# EAGLE board V1.3_Placa de sensores multiplexada (EAGLE 5.11)
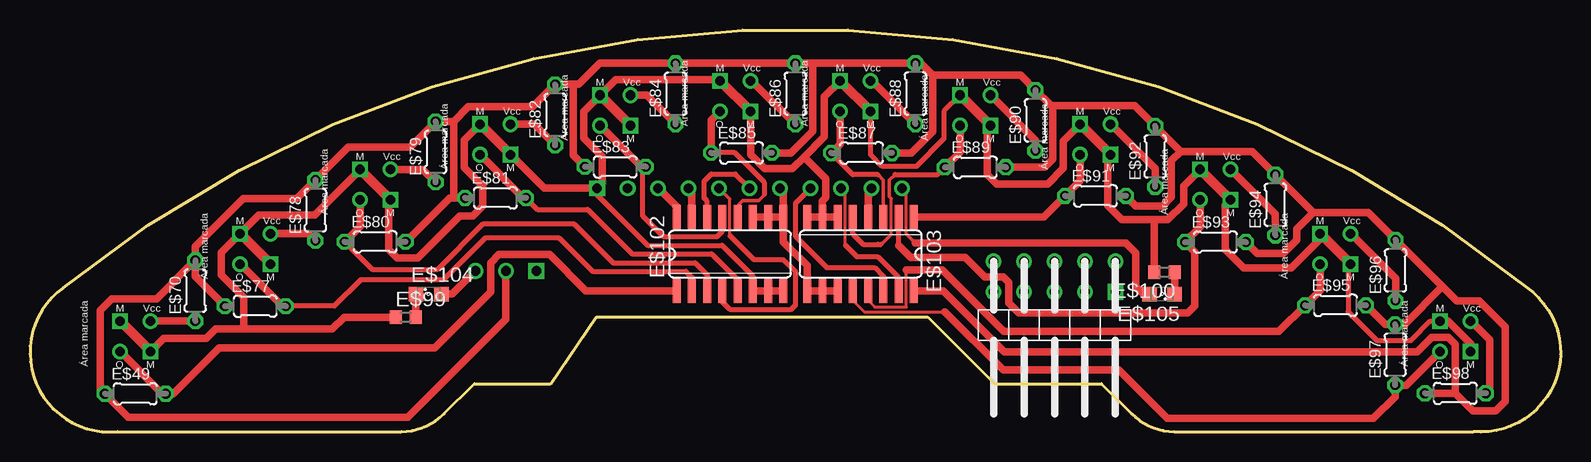
[diagram p0: board, top side]
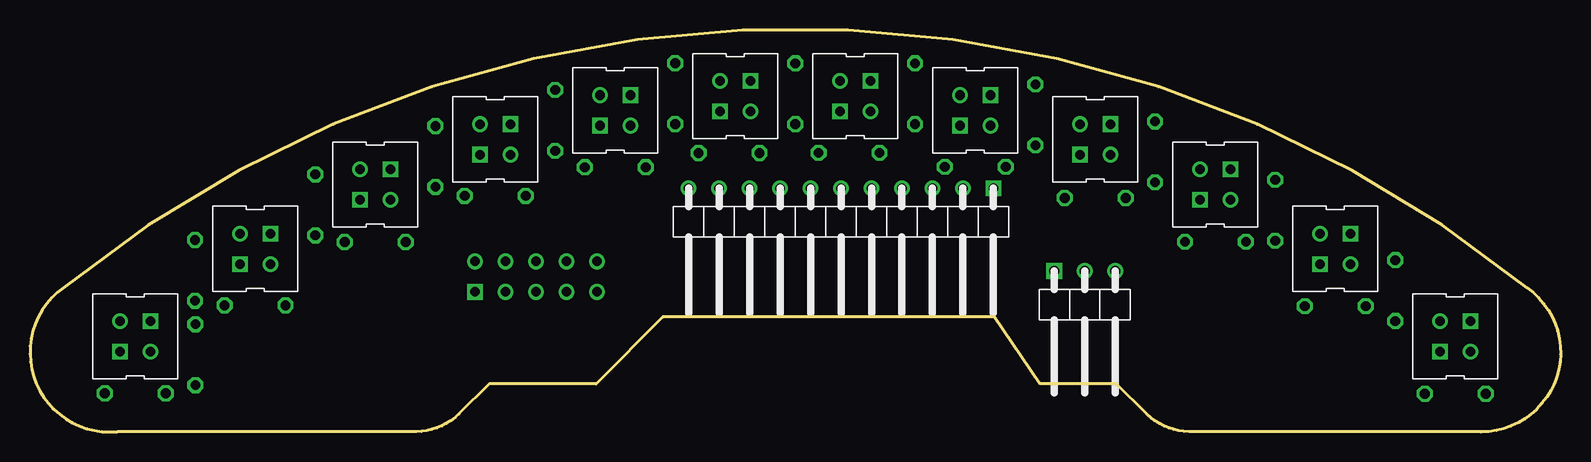
[diagram p1: board, bottom side, seen from below]

Size 127.55 x 33.53 mm. Coordinates in mm from the lower left corner, seen from the top.
Outline: 2.78,12.03 arc-78 124.78,12.03 arc-150 120.28,0.03 95.35,0.03 arc-45 91.81,1.5 89.28,4.03 80.38,4.01 74.81,9.58 47.2,9.58 43.4,4.03 37.03,4.03 34.49,1.5 arc-45 30.95,0.03 7.28,0.03 arc-150 2.78,12.03
Copper layers (1*16): Top 0.035mm / dielectric 1.5mm / Bottom 0.035mm
Design rules "default": minimum track width 10mil, minimum drill 24mil, track to track 8mil, track to pad 8mil, pad to pad 8mil, via to via 8mil, smd to smd 8mil, copper to edge 40mil, drill to drill 8mil, minimum pad ring 10mil, minimum via ring 8mil, stop-mask expansion 4mil, vias tented up to drill 0mil, thermal gap 10mil

## Footprints (pad centres in the part's own frame; a part is rotated, then mirrored left to right if it is on the bottom)
CNY70 = drill 0.8 square: P$1 -1.27,1.27; P$2 1.27,-1.27 | drill 0.8 round: P$3 1.27,1.27; P$4 -1.27,-1.27
TIRADE3PINESTUMBADOS = drill 0.8 round: P$1 1.27,-1.524; P$2 3.81,-1.524 | drill 0.8 square: P$3 6.35,-1.524
CON_M_RT_ANG_2X5 = drill 0.8 round: P$1 -4.064,11.43; P$3 -1.524,8.89; P$4 -4.064,8.89; P$5 -4.064,6.35; P$6 -4.064,3.81; P$7 -4.064,1.27; P$8 -1.524,1.27; P$9 -1.524,3.81; P$10 -1.524,6.35 | drill 0.8 square: P$2 -1.524,11.43
0204/5 = drill 0.813 octagon: 1 -2.54,0; 2 2.54,0
R0603 = smd 1 x 1.1: 1 -0.85,0; 2 0.85,0
11_PINES_MACHO_TUMBADOS = drill 0.8 round: P$1 3.81,-1.524; P$2 6.35,-1.524; P$3 8.89,-1.524; P$4 11.43,-1.524; P$5 13.97,-1.524; P$6 16.51,-1.524; P$7 19.05,-1.524; P$8 21.59,-1.524; P$9 24.13,-1.524; P$10 26.67,-1.524 | drill 0.8 square: P$11 1.27,-1.524
SO16 = smd 0.66 x 2.032: 1 -4.445,-3.073; 2 -3.175,-3.073; 3 -1.905,-3.073; 4 -0.635,-3.073; 5 0.635,-3.073; 6 1.905,-3.073; 7 3.175,-3.073; 8 4.445,-3.073; 9 4.445,3.073; 10 3.175,3.073; 11 1.905,3.073; 12 0.635,3.073; 13 -0.635,3.073; 14 -1.905,3.073; 15 -3.175,3.073; 16 -4.445,3.073
SML0805 = smd 1.2 x 1.2: A 1.05,0; C -1.05,0

## Placement (x,y rotation side)
E$1  [DIBUJO_ARAÑAZOS]  23.04,2.58 90 top
E$2  [DIBUJO_ARAÑAZOS]  85.68,18.68 0 top
E$10  [CNY70]  28.78,20.63 0 top
E$20  [CNY70]  88.78,24.4 0 top
E$22  [CNY70]  98.78,20.63 0 top
E$23  [CNY70]  108.78,15.27 0 top
E$28  [CNY70]  78.78,26.82 0 top
E$40  [CNY70]  68.78,28.01 0 top
E$41  [CNY70]  58.78,28.01 0 top
E$42  [CNY70]  118.78,7.97 0 top
E$43  [CNY70]  48.78,26.82 0 top
E$44  [TIRADE3PINESTUMBADOS]  35.85,11.9 180 bottom
E$45  [CON_M_RT_ANG_2X5]  79.03,10.16 270 top
E$46  [CNY70]  38.78,24.4 0 top
E$47  [CNY70]  18.78,15.27 0 top
E$48  [CNY70]  8.78,7.97 0 top
E$49  [0204/5]  8.78,3.18 0 top
E$70  [0204/5]  13.78,11.79 90 top
E$77  [0204/5]  18.78,10.49 0 top
E$78  [0204/5]  23.79,18.49 90 top
E$79  [0204/5]  33.81,23.36 90 top
E$80  [0204/5]  28.77,15.86 0 top
E$81  [0204/5]  38.79,19.52 0 top
E$82  [0204/5]  43.77,26.45 90 top
E$83  [0204/5]  48.78,22.12 0 top
E$84  [0204/5]  53.8,28.21 90 top
E$85  [0204/5]  59.3,23.28 0 top
E$86  [0204/5]  63.78,28.21 90 top
E$87  [0204/5]  69.3,23.27 0 top
E$88  [0204/5]  73.79,28.22 90 top
E$89  [0204/5]  78.78,22.08 0 top
E$90  [0204/5]  83.79,25.99 90 top
E$91  [0204/5]  88.79,19.69 0 top
E$92  [0204/5]  93.77,22.98 90 top
E$93  [0204/5]  98.79,15.84 0 top
E$94  [0204/5]  103.78,18.94 90 top
E$95  [0204/5]  108.8,10.56 0 top
E$96  [0204/5]  113.8,13.48 90 top
E$97  [0204/5]  113.77,6.44 90 top
E$98  [0204/5]  118.78,3.22 0 top
E$99  [R0603]  31.32,9.57 0 top
E$100  [R0603]  94.53,13.32 180 top
E$101  [11_PINES_MACHO_TUMBADOS]  46,18.81 180 bottom
E$102  [SO16]  58.34,14.84 0 top
E$103  [SO16]  69.22,14.84 180 top
E$104  [SML0805]  33.23,11.5 0 top
E$105  [SML0805]  94.33,11.5 180 top

## Library data of the parts
E$1 E$2 E$10 E$20 E$22 E$23 E$28 E$40-E$48 E$101 = Robot
E$49 E$70 E$77-E$100 = resistor
E$102 E$103 = 40xx
E$104 E$105 = led

## Nets
S$3: E$99.2 E$104.C
S$5: E$46.P$4 E$81.2 E$102.5
S$6: E$42.P$4 E$97.1 E$103.12
S$7: E$23.P$4 E$95.1 E$103.13
S$8: E$22.P$4 E$93.1 E$103.2
S$9: E$20.P$4 E$91.1 E$103.1
S$10: E$28.P$4 E$89.1 E$103.5
S$11: E$40.P$4 E$87.1 E$103.3
S$14: E$41.P$4 E$85.1 E$102.12
S$57: E$44.P$2 E$49.1 E$70.2 E$77.1 E$78.2 E$79.2 E$80.2 E$81.1 E$82.2 E$83.1 E$84.2 E$85.2 E$86.2 E$87.2 E$88.2 E$89.2 E$90.2 E$91.2 E$92.2 E$93.2 E$94.2 E$95.2 E$96.2 E$97.2 E$98.1 E$103.16
S$66: E$47.P$4 E$77.2 E$102.2
S$69: E$101.P$5 E$102.14
S$70: E$48.P$4 E$49.2 E$102.1
S$71: E$43.P$4 E$83.2 E$102.13
S$72: E$101.P$7 E$103.14
S$73: E$48.P$3 E$70.1
S$74: E$47.P$3 E$78.1
S$75: E$10.P$3 E$79.1
S$76: E$46.P$3 E$82.1
S$77: E$43.P$3 E$84.1
S$78: E$41.P$3 E$86.1
S$79: E$40.P$3 E$88.1
S$80: E$28.P$3 E$90.1
S$81: E$20.P$3 E$92.1
S$82: E$22.P$3 E$94.1
S$83: E$23.P$3 E$96.1
S$84: E$42.P$3 E$98.2
S$85: E$44.P$1 E$104.A
S$86: E$100.1 E$105.C
S$87: E$101.P$8 E$103.15
S$88: E$101.P$3 E$102.15
S$89: E$101.P$2 E$102.16
S$90: E$101.P$6 E$102.9 E$102.10 E$102.11 E$103.9 E$103.10 E$103.11
S$91: E$101.P$9 E$103.4
S$93: E$10.P$4 E$80.1 E$102.3
S$94: E$101.P$4 E$102.4
S$95: E$101.P$10 E$105.A
S$96: E$10.P$1 E$10.P$2 E$20.P$1 E$20.P$2 E$22.P$1 E$22.P$2 E$23.P$1 E$23.P$2 E$28.P$1 E$28.P$2 E$40.P$1 E$40.P$2 E$41.P$1 E$41.P$2 E$42.P$1 E$42.P$2 E$43.P$1 E$43.P$2 E$46.P$1 E$46.P$2 E$47.P$1 E$47.P$2 E$48.P$1 E$48.P$2 E$99.1 E$100.2 E$101.P$11 E$102.6 E$102.7 E$102.8 E$103.6 E$103.7 E$103.8

## Tracks (layer width: path | path; a pad name or v marks a point on that pad's centre or on a via)
S$3
  Top 0.61: E$99.2 E$104.C
S$5
  Top 0.406: E$102.5 58.97,12.69 56.8,14.86 50.19,14.86 46.48,18.57 42.28,18.57 E$81.2
  Top 0.61: E$46.P$4 41.12,19.52 E$81.2
S$6
  Top 0.254: E$103.12 68.58,10.96 69.52,10.02 76.24,10.02
  Top 0.61: E$42.P$4 114.71,3.9 E$97.1 113.77,2.94 111.95,1.12 94.78,1.12 90.74,5.16 81.1,5.16 76.24,10.02
S$7
  Top 0.254: E$103.13 69.85,10.97 70.4,10.42 73.03,10.42 73.03,13.49
  Top 0.61: E$23.P$4 107.51,11.81 E$95.1 104.07,8.37 81.15,8.37 76.03,13.49 73.03,13.49
S$8
  Top 0.406: 72.39,15.57 E$103.2
  Top 0.61: E$22.P$4 97.51,17.1 E$93.1 97.08,15.01 97.08,10.51 96.49,9.92 82.4,9.92 81.58,10.74 81.58,12.48 81.12,12.94 79.58,12.94 77.95,14.57 73.39,14.57 72.39,15.57
S$9
  Top 0.61: E$20.P$4 87.51,20.95 E$91.1 84.47,17.91 E$103.1
S$10
  Top 0.254: 71.76,16.48 71.76,19.48
  Top 0.305: 72.09,21.48 71.6,20.99 71.6,19.64 71.76,19.48 | 70.93,15.65 71.76,16.48
  Top 0.406: E$89.1 75.64,21.48 72.09,21.48 | E$103.5 68.58,16.52 69.45,15.65 70.68,15.65 70.93,15.65
  Top 0.61: E$89.1 77.51,23.35 E$28.P$4
S$11
  Top 0.305: 70.69,21.45 71.12,21.02 E$103.3
  Top 0.406: E$87.1 68.58,21.45 70.69,21.45
  Top 0.61: E$87.1 67.51,24.02 E$40.P$4
S$14
  Top 0.305: 61.22,19.81 60.72,19.31 59.42,19.31 58.97,18.87 E$102.12
  Top 0.406: 61.22,19.81 61.22,20.79 58.72,23.29 E$85.1
  Top 0.61: E$41.P$4 56.76,25.99 E$85.1
S$57
  Top 0.61: E$80.2 34.97,19.52 35.31,19.52 | 35.31,19.52 E$81.1 | E$95.2 112.93,8.97 E$97.2 | E$97.2 | E$93.2 102.27,14.9 104.44,14.9 105.57,16.03 105.57,16.93 106.95,18.31 | 106.95,18.31 111.51,18.31 E$96.2 117.7,12.12 | E$91.2 92.16,18.86 94.39,18.86 95.12,19.59 95.12,22.63 95.89,23.4 | 106.95,18.31 E$94.2 101.86,23.4 95.89,23.4 | E$89.2 84.58,22.08 85.25,22.75 85.25,27.19 85.23,27.21 | 95.89,23.4 E$92.2 92.08,27.21 85.23,27.21 | 85.23,27.21 85.11,27.21 E$90.2 82.56,29.76 75.24,29.76 | E$87.2 73.46,23.27 75.24,25.05 75.24,29.76 | 75.24,29.76 74.24,30.76 E$88.2 65.24,30.75 | E$70.2 13.78,15.46 17.78,19.46 22.22,19.46 E$78.2 26.54,23.78 31.69,23.78 E$79.2 35.31,25.9 | 45.27,28.99 E$82.2 41.9,27.12 36.53,27.12 35.31,25.9 | 45.27,28.99 45.74,28.99 47.5,30.75 E$84.2 E$86.2 65.24,30.75 | 35.31,25.9 35.31,19.52 | E$70.2 10.55,11.1 6.81,11.1 5.85,10.14 5.85,3.57 E$49.1 8.21,1.21 31.48,1.21 39.66,9.39 E$44.P$2 | E$77.1 13.78,12.95 E$70.2 | E$83.1 45.26,23.1 45.26,28.98 45.27,28.99 | E$85.2 63.42,23.28 65.24,25.1 65.24,30.75 | 117.7,12.12 118.9,10.92 120.77,10.92 122.93,8.76 122.93,2.56 122.13,1.76 120.24,1.76 118.78,3.22 | E$97.2 114.56,8.97 117.7,12.12 | 118.78,3.22 118.78,7.31 118.19,7.9 116.83,7.9 115.6,6.67 81.19,6.67 76.09,11.77 E$103.16 | 118.78,3.22 E$98.1
S$66
  Top 0.406: E$102.2 55.16,12.9 54.66,13.4 46.88,13.4 44.11,16.17 37.93,16.17 34.44,12.68 27.56,12.68 25.37,10.49 E$77.2
  Top 0.61: E$77.2 21.02,10.49 E$47.P$4
S$69
  Top 0.406: E$102.14 56.43,19.26 56.18,19.51 56.18,20.92 56.78,21.52 58.78,21.52 E$101.P$5
S$70
  Top 0.61: E$48.P$4 11.03,3.18 E$49.2 | E$49.2 11.67,3.18 | E$102.1 46.33,11.77 43.3,14.8 39.08,14.8 38.39,14.11 38.39,11.67 33.75,7.03 15.78,7.03 11.93,3.18 E$49.2
S$71
  Top 0.406: E$102.13 57.7,16.74 57.26,16.29 52.79,16.29 51.06,18.02 51.06,21.86 E$83.2
  Top 0.61: E$43.P$4 50.94,22.12 E$83.2 51.1,21.9
S$72
  Top 0.406: E$103.14 71.12,12.99 70.4,13.71 66.4,13.71 63.8,16.31 63.8,19.09 E$101.P$7
S$73
  Top 0.61: E$48.P$3 E$70.1
S$74
  Top 0.61: E$47.P$3 23.2,16.54 E$78.1
S$75
  Top 0.61: E$10.P$3 32.73,21.9 E$79.1
S$76
  Top 0.61: E$46.P$3 42.01,25.67 E$82.1
S$77
  Top 0.61: E$43.P$3 51.38,28.09 E$84.1
S$78
  Top 0.61: E$41.P$3 60.17,29.28 E$86.1
S$79
  Top 0.61: E$40.P$3 70.19,29.28 E$88.1
S$80
  Top 0.61: E$28.P$3 83.79,24.35 E$90.1
S$81
  Top 0.61: E$20.P$3 93.77,21.95 E$92.1
S$82
  Top 0.61: E$22.P$3 103.78,18.17 E$94.1
S$83
  Top 0.61: E$23.P$3 113.8,12.79 E$96.1
S$84
  Top 0.61: E$42.P$3 121.63,7.66 121.63,3.53 E$98.2
S$85
  Top 0.61: E$104.A 35.19,11.5 E$44.P$1
S$86
  Top 0.61: E$105.C E$100.1
S$87
  Top 0.254: 67.95,15.58 67.95,19.98
  Top 0.305: 67.95,19.98 E$101.P$8
  Top 0.406: E$103.15 72.39,12.87 71.05,14.21 70.63,14.63 68.9,14.63 67.95,15.58
S$88
  Top 0.61: E$101.P$3 55.16,20.06 E$102.15
S$89
  Top 0.61: E$102.16 53.89,18.79 E$101.P$2
S$90
  Top 0.61: E$102.11 E$102.10 E$102.9 | E$103.11 E$103.10 E$103.9 64.77,13.87 62.78,15.86 E$102.9 | E$102.9 62.78,20.06 E$101.P$6
S$91
  Top 0.61: E$103.4 69.85,20.06 E$101.P$9
S$93
  Top 0.406: E$80.1 28.57,13.52 33.93,13.52 37.74,17.33 45.37,17.33 48.59,14.11 55.43,14.11 56.43,13.11 E$102.3
  Top 0.61: E$10.P$4 27.51,17.14 E$80.1
S$94
  Top 0.254: 58.33,16.38 58.33,19.44
  Top 0.305: 58.33,19.44 E$101.P$4
  Top 0.406: E$102.4 57.7,10.83 58.3,10.23 63.45,10.23 63.8,10.58 63.8,13.35 62.79,14.36 60.35,14.36 58.33,16.38
S$95
  Top 0.254: 73.03,16.5 73.03,19.98
  Top 0.305: 73.03,19.98 E$101.P$10 | 73.03,16.5 73.76,15.77
  Top 0.61: E$105.A 92.76,11.5 92.13,12.13 92.13,14.94 91.3,15.77 73.76,15.77
S$96
  Top 0.406: E$102.6 60.24,13.01 57.68,15.57 51.47,15.57 47.27,19.78 E$101.P$11 | E$23.P$2 109.85,13.8 109.85,10.02 112.24,7.63 115.1,7.63 116.71,9.24 E$42.P$1 | E$28.P$1 76.17,26.75 76.17,24.45 73.86,22.14 71.04,22.14 70.05,23.13 E$40.P$2
  Top 0.61: E$23.P$1 107.51,16.1 105.09,13.68 101.16,13.68 99.61,15.23 99.61,18.92 E$22.P$2 | E$22.P$1 96.13,20.52 96.13,19.02 94.83,17.72 93.83,17.72 | 93.83,17.72 90.99,17.72 89.83,18.88 89.83,22.91 E$20.P$2 | E$20.P$1 86.12,24.28 86.12,22 84.81,20.69 80.58,20.69 79.79,21.48 79.79,25.29 E$28.P$2 | E$48.P$2 11.16,7.81 14.71,7.81 15.49,8.59 17.83,8.59 | E$103.7 E$103.6 | E$103.7 E$103.8 | E$40.P$1 66.18,27.95 66.18,24.62 64.5,22.95 | 64.5,22.95 66.32,21.13 66.32,19.54 66.04,19.27 E$103.7 | E$10.P$1 23.72,18.11 19.08,18.11 E$47.P$1 15.93,14.96 15.93,13.1 17.83,11.2 17.83,8.59 | E$41.P$1 57.39,29.4 48.82,29.4 E$43.P$1 46.15,26.73 46.15,24.49 47.68,22.96 47.68,20.74 E$101.P$11 | E$10.P$2 29.88,19.19 29.88,15.22 30.61,14.49 32.3,14.49 35.82,18.01 36.92,18.01 37.75,18.84 37.75,20.5 36.19,22.06 36.19,24.35 E$46.P$1 | E$102.8 E$102.7 E$102.6 | E$101.P$11 | E$101.P$11 42.85,20.33 E$46.P$2 | E$100.2 93.68,17.57 93.83,17.72 | E$41.P$2 60.05,23.14 61.22,21.97 63.53,21.97 64.5,22.95 | E$42.P$2 120.05,7.36 118.17,9.24 E$42.P$1 | 17.83,8.59 25.21,8.59 26.19,9.57 E$99.1
  Top 0.813: E$23.P$1 E$23.P$2 | E$22.P$1 E$22.P$2 | E$20.P$1 E$20.P$2 | E$28.P$2 E$28.P$1 | E$48.P$2 E$48.P$1 | E$40.P$1 E$40.P$2 | E$47.P$1 E$47.P$2 | E$10.P$2 E$10.P$1 | E$41.P$1 E$41.P$2 | E$43.P$1 E$43.P$2 | E$46.P$1 E$46.P$2

## Text on the board
TEXTO_AZUL: PUMA | RESAJ